# EAGLE board input_board_proto_rev2 (EAGLE 7.4.0)
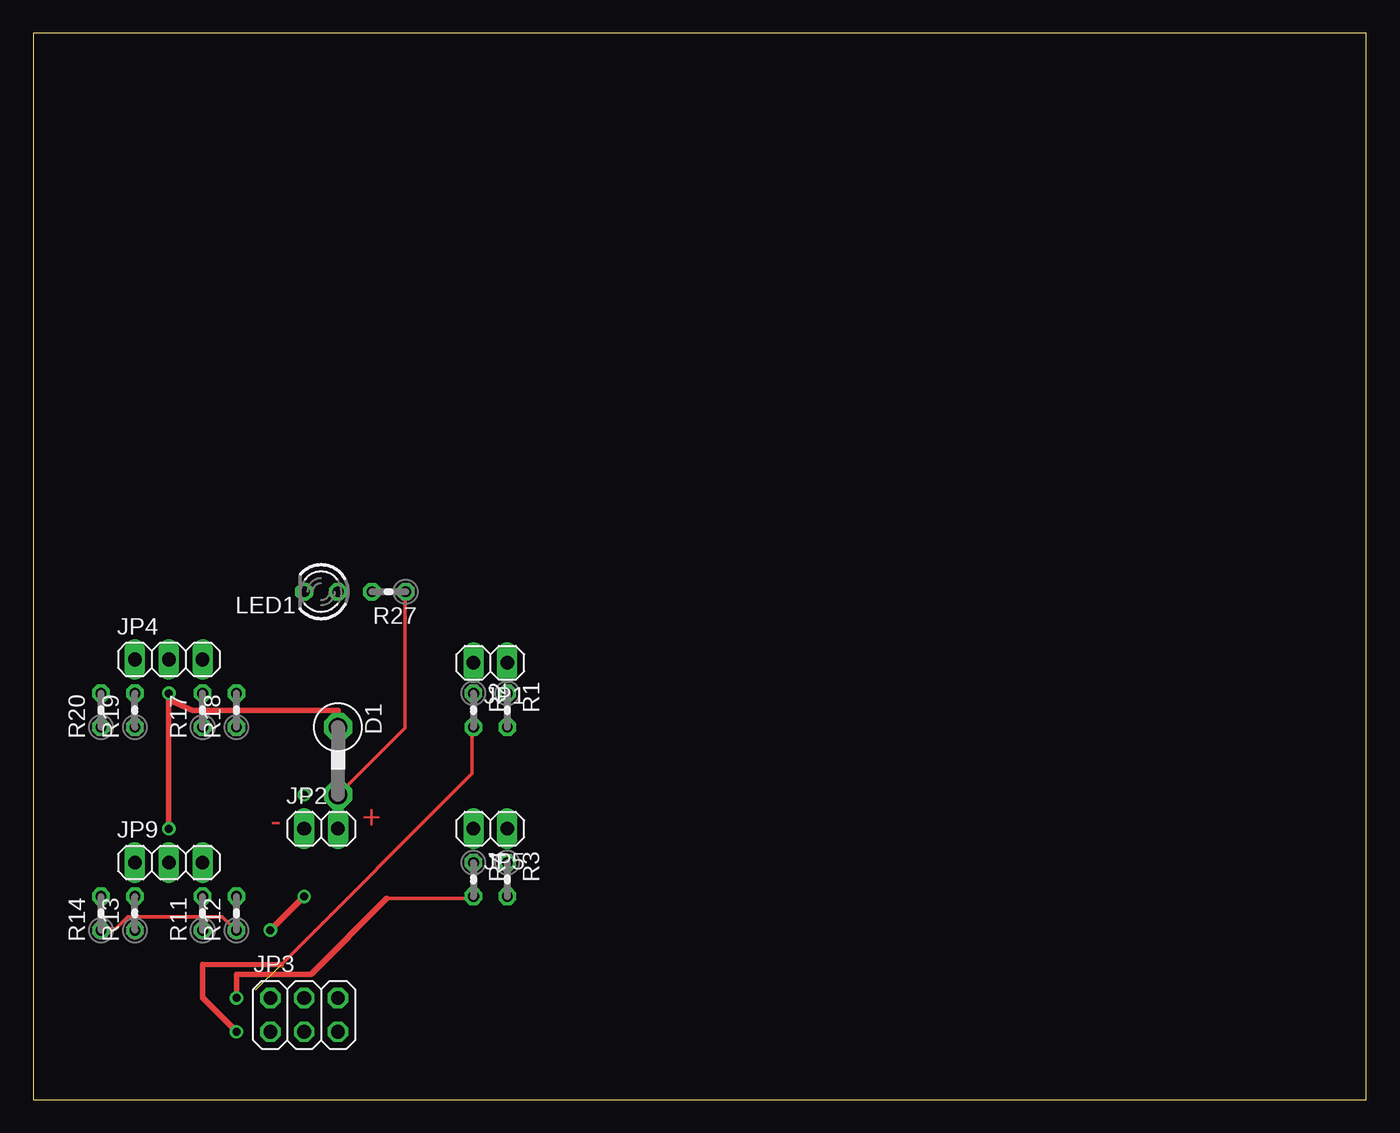
[diagram p0: board, top side]
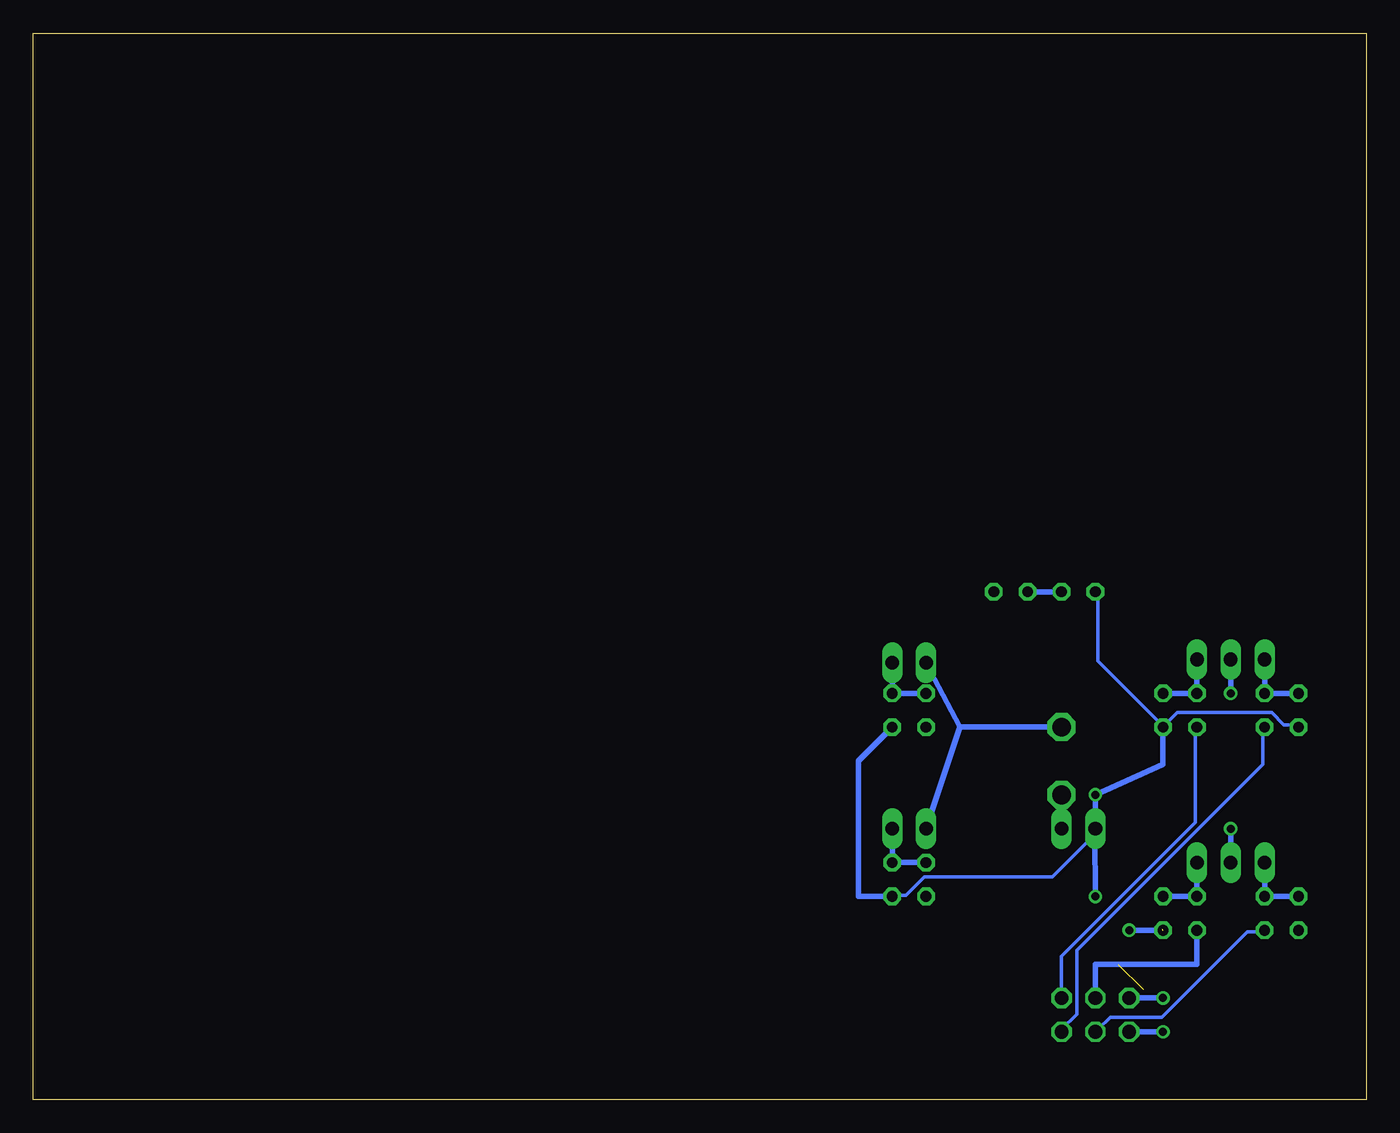
[diagram p1: board, bottom side, seen from below]

Size 100 x 80 mm. Coordinates in mm from the lower left corner, seen from the top.
Outline: 0,0 100,0 100,80 0,80 0,0
Copper layers (1*16): Top 0.035mm / dielectric 1.5mm / Bottom 0.035mm
Design rules "default": minimum track width 10mil, minimum drill 24mil, track to track 8mil, track to pad 8mil, pad to pad 8mil, via to via 8mil, smd to smd 8mil, copper to edge 40mil, drill to drill 8mil, minimum pad ring 10mil, minimum via ring 8mil, stop-mask expansion 4mil, vias tented up to drill 0mil, thermal gap 10mil

## Footprints (pad centres in the part's own frame; a part is rotated, then mirrored left to right if it is on the bottom)
C1702-05 = drill 1.397 octagon: A 2.54,0; C -2.54,0
1X02 = drill 1.016 long: 1 -1.27,0; 2 1.27,0
2X03 = drill 1.016 octagon: 1 -2.54,-1.27; 2 -2.54,1.27; 3 0,-1.27; 4 0,1.27; 5 2.54,-1.27; 6 2.54,1.27
1X03 = drill 1.016 long: 1 -2.54,0; 2 0,0; 3 2.54,0
LED3MM = drill 0.813 octagon: A -1.27,0; K 1.27,0
0204V = drill 0.813 octagon: 1 -1.27,0; 2 1.27,0

## Placement (x,y rotation side)
D1  [C1702-05]  22.86,25.4 270 top
JP1  [1X02]  34.29,32.77 180 top
JP2  [1X02]  21.59,20.32 0 top
JP3  [2X03]  20.32,6.35 0 top
JP4  [1X03]  10.16,33.02 0 top
JP5  [1X02]  34.29,20.32 180 top
JP9  [1X03]  10.16,17.78 0 top
LED1  [LED3MM]  21.59,38.1 180 top
R1  1K  [0204V]  35.56,29.21 270 top
R2  220  [0204V]  33.02,29.21 270 top
R3  1K  [0204V]  35.56,16.51 270 top
R4  220  [0204V]  33.02,16.51 270 top
R11  220  [0204V]  12.7,13.97 90 top
R12  1K  [0204V]  15.24,13.97 90 top
R13  220  [0204V]  7.62,13.97 90 top
R14  1K  [0204V]  5.08,13.97 90 top
R17  220  [0204V]  12.7,29.21 90 top
R18  1K  [0204V]  15.24,29.21 90 top
R19  220  [0204V]  7.62,29.21 90 top
R20  1K  [0204V]  5.08,29.21 90 top
R27  220  [0204V]  26.67,38.1 180 top

## Library data of the parts
D1 = diode
JP1-JP5 JP9 = pinhead
LED1 = led
R1-R4 R11-R14 R17-R20 R27 = resistor

## Nets
GND: JP2.1 LED1.K R1.2 R3.2 R12.1 R14.1 R18.1 R20.1
N$1: JP1.1 R1.1 R2.1
N$4: JP5.1 R3.1 R4.1
N$8: JP3.1 R2.2
N$9: JP3.2 R4.2
N$14: JP9.3 R11.2 R12.2
N$15: JP9.1 R13.2 R14.2
N$17: JP4.3 R17.2 R18.2
N$18: JP4.1 R19.2 R20.2
N$26: JP3.6 R17.1
N$27: JP3.4 R11.1
N$31: JP3.5 R19.1
N$32: JP3.3 R13.1
N$33: LED1.A R27.2
N$35: D1.C JP1.2 JP4.2 JP5.2 JP9.2
VCC: D1.A JP2.2 R27.1

## Tracks (layer width: path | path; a pad name or v marks a point on that pad's centre or on a via)
GND  (via drill 0.6)  (1 unrouted)
  Top 0.254: R14.1 5.26,12.8 6.17,12.8 7.09,13.72 14.17,13.72 15.09,12.8 R12.1
  Top 0.406: v17.78,12.7 v20.32,15.24
  Bottom 0.254: R20.1 5.26,28.12 6.17,28.12 7.09,29.03 14.17,29.03 15.09,28.12 R18.1 15.32,28.12 20.12,32.92 20.12,37.95 LED1.K | R3.2 35.43,15.32 34.52,15.32 33.15,16.69 23.55,16.69 20.34,19.89 JP2.1
  Bottom 0.406: 20.32,20.07 JP2.1 v20.32,22.86 15.24,25.15 R18.1 | R1.2 38.1,25.4 38.1,15.24 R3.2 | 20.34,19.89 v20.32,15.24 | R12.1 v17.78,12.7
N$1
  Bottom 0.406: JP1.1 R1.1 R2.1
N$2  (via drill 0.6)
  other vias: 15.24,7.62
N$3  (via drill 0.6)
  other vias: 15.24,5.08
N$4
  Bottom 0.406: R4.1 R3.1 JP5.1
N$8  (via drill 0.6)  (1 unrouted)
  Top 0.254: 18.58,10.12 32.92,24.46 32.92,27.89 R2.2
  Top 0.406: v15.24,5.08 12.7,7.62 12.7,10.16 18.58,10.12
  Bottom 0.406: JP3.1 v15.24,5.08
N$9  (via drill 0.6)
  Top 0.254: 26.52,15.09 32.92,15.09 R4.2
  Top 0.406: v15.24,7.62 15.24,9.4 20.83,9.4 26.52,15.09
  Bottom 0.406: JP3.2 v15.24,7.62
N$11  (via drill 0.6)
  other vias: 10.16,20.32
N$13  (via drill 0.6)
  other vias: 10.16,30.48
N$14
  Bottom 0.406: JP9.3 R11.2 R12.2
N$15
  Bottom 0.406: JP9.1 R13.2 R14.2
N$16  (via drill 0.6)
  other vias: 20.32,22.86
N$17
  Bottom 0.406: JP4.3 R17.2 R18.2
N$18
  Bottom 0.406: JP4.1 R19.2 R20.2
N$20  (via drill 0.6)
  other vias: 20.32,15.24
N$21  (via drill 0.6)
  other vias: 17.78,12.7
N$26
  Bottom 0.254: JP3.6 22.86,10.74 12.8,20.8 12.8,27.89 R17.1
N$27
  Bottom 0.406: R11.1 12.7,10.16 20.32,10.16 JP3.4
N$31
  Bottom 0.254: R19.1 7.77,27.89 7.77,25.15 21.72,11.2 21.72,6.4 22.86,5.26 JP3.5
N$32
  Bottom 0.254: R13.1 7.77,12.57 8.91,12.57 15.32,6.17 19.2,6.17 20.12,5.26 JP3.3
N$33
  Bottom 0.406: R27.2 LED1.A
N$35  (via drill 0.6)
  Top 0.406: v10.16,20.32 10.16,29.97 | 10.16,29.97 v10.16,30.48 | D1.C 22.86,29.21 11.94,29.21 10.16,29.97
  Bottom 0.406: 33.02,32.51 JP1.2 30.48,27.94 | JP5.2 30.48,27.94 | 30.48,27.94 D1.C | JP9.2 v10.16,20.32 | v10.16,30.48 JP4.2
VCC
  Top 0.254: D1.A 27.89,27.89 27.89,37.95 R27.1
  Bottom 0.406: JP2.2 D1.A

## Text on the board
Top: - | +